# EAGLE board Offical Waffle Maker Copy (EAGLE 9.7.0)

Size 129.43 x 199.96 mm. Coordinates in mm from the lower left corner, seen from the top.
Outline: 0,0 129.44,0 129.44,199.96 0,199.96 0,0
Copper layers (1*16): Top 0.035mm / dielectric 1.5mm / Bottom 0.035mm
Design rules "default": minimum track width 6mil, minimum drill 0.35mm, track to track 6mil, track to pad 6mil, pad to pad 6mil, via to via 6mil, smd to smd 6mil, copper to edge 40mil, drill to drill 6mil, minimum pad ring 10mil, minimum via ring 8mil, stop-mask expansion 4mil, vias tented up to drill 0mil, thermal gap 10mil

## Footprints (pad centres in the part's own frame; a part is rotated, then mirrored left to right if it is on the bottom)
LEDRD254W60D565H860B = drill 0.981 pad 1.581: 1 -1.27,0; 2 1.27,0
LED-RGB-5MM = drill 0.9: B 0.635,0.635; C -0.635,-0.635; G 1.905,-0.635; R -1.905,0.635
MOTOR = drill 1.118 pad 3.15 octagon: + 2.54,0; - -2.54,0
DG01D = drill 1.118 pad 3.15 octagon: + 2.54,0; - -2.54,0
RESAD1016W63L850D250B = drill 0.83 pad 1.43: 1 -5.08,0; 2 5.08,0
HA-06-SM065 = drill 1 pad 1.676: 1 -2.54,-2.54; 2 0,2.54; 3 2.54,-2.54
SWITCH-MOMENTARY-PTH-6.5MM = drill 1.016 pad 1.88: 1 -3.251,2.261; 2 3.251,2.261; 3 -3.251,-2.261; 4 3.251,-2.261
SG90 = drill 1.016 long: 1 -2.54,0; 2 0,0; 3 2.54,0
ARDUINO-UNO-R3-SHIELD = drill 1.016 pad 1.88: 3.3V 24.13,-2.54; 5V 24.13,0; A0 24.13,12.7; A1 24.13,15.24; A2 24.13,17.78; A3 24.13,20.32; A4 24.13,22.86; A5 24.13,25.4; AREF -24.13,-13.97; D2 -24.13,20.32; D3 -24.13,17.78; D4 -24.13,15.24; D5 -24.13,12.7; D6 -24.13,10.16; D7 -24.13,7.62; D8 -24.13,3.81; D9 -24.13,1.27; D10 -24.13,-1.27; D11 -24.13,-3.81; D12 -24.13,-6.35; D13 -24.13,-8.89; GND@0 24.13,2.54; GND@1 24.13,5.08; GND@2 -24.13,-11.43; IOREF 24.13,-7.62; NC 24.13,-10.16; RES 24.13,-5.08; RX -24.13,25.4; SCL -24.13,-19.05; SDA -24.13,-16.51; TX -24.13,22.86; VIN 24.13,7.62

## Placement (x,y rotation side)
D1  RED  [LEDRD254W60D565H860B]  73.28,92.08 180 top
D2  LED-RGBRCBG-PTH  [LED-RGB-5MM]  52.97,92.08 0 top
M1  MOTOR_HDR  [MOTOR]  76.85,116.55 0 top
M2  MOTOR_DG01D  [DG01D]  41.26,125.67 180 top
R1  1k  [RESAD1016W63L850D250B]  84.72,66.67 90 top
R2  330  [RESAD1016W63L850D250B]  74.56,84.45 90 top
R3  10k  [RESAD1016W63L850D250B]  49.16,84.45 90 top
R4  10k  [RESAD1016W63L850D250B]  54.23,84.45 90 top
R5  10k  [RESAD1016W63L850D250B]  56.77,84.45 90 top
R6  1k  [RESAD1016W63L850D250B]  44.08,66.67 90 top
R7  1k  [RESAD1016W63L850D250B]  33.91,66.67 90 top
RPOT1  250k  [HA-06-SM065]  64.39,81.92 0 top
RPOT2  250k  [HA-06-SM065]  21.21,81.92 0 top
S1  SWITCH_MOMENTARY  [SWITCH-MOMENTARY-PTH-6.5MM]  82.17,85.72 90 top
S2  SWITCH_MOMENTARY  [SWITCH-MOMENTARY-PTH-6.5MM]  41.53,85.72 90 top
S3  SWITCH_MOMENTARY  [SWITCH-MOMENTARY-PTH-6.5MM]  31.38,85.72 90 top
SERVO1  SERVOSG90  [SG90]  122.45,119.04 0 top
U1  ARDUINO-UNO-R3-SHIELD  [ARDUINO-UNO-R3-SHIELD]  47.88,29.84 270 top

## Library data of the parts
D1 = Tinkercad; CATEGORY: Opto-Electronic; SUB-CATEGORY: LED; VALUE: LED_RED
D2 M1 M2 R1-R7 RPOT1 RPOT2 S1-S3 SERVO1 U1 = Tinkercad

## Nets
D1_A: D1.1 R2.2
D2_B: D2.B R4.2
D2_G: D2.G R5.2
D2_R: D2.R R3.2
U1_5V: R1.1 R6.1 R7.1 RPOT1.3 RPOT2.3 SERVO1.2 U1.5V
U1_A0: RPOT1.2 U1.A0
U1_A1: RPOT2.2 U1.A1
U1_D2: SERVO1.3 U1.D2
U1_D3: M1.+ U1.D3
U1_D6: M2.+ U1.D6
U1_D9: R5.1 U1.D9
U1_D10: R4.1 U1.D10
U1_D11: R3.1 U1.D11
U1_D12: R6.2 S2.3 S2.4 U1.D12
U1_D13: R7.2 S3.3 S3.4 U1.D13
U1_GND: D1.2 D2.C M1.- M2.- RPOT1.1 RPOT2.1 S1.1 S1.2 S2.1 S2.2 S3.1 S3.2 SERVO1.1 U1.GND@0 U1.GND@1 U1.GND@2
U1_RX: R1.2 S1.3 S1.4 U1.RX
U1_TX: R2.1 U1.TX

## Tracks (layer width: path | path; a pad name or v marks a point on that pad's centre or on a via)
D1_A  (1 unrouted)
D2_B  (1 unrouted)
D2_G  (1 unrouted)
D2_R  (1 unrouted)
U1_5V  (6 unrouted)
U1_A0  (1 unrouted)
U1_A1  (1 unrouted)
U1_D2  (1 unrouted)
U1_D3  (1 unrouted)
U1_D6  (1 unrouted)
U1_D9  (1 unrouted)
U1_D10  (1 unrouted)
U1_D11  (1 unrouted)
U1_D12  (3 unrouted)
U1_D13  (3 unrouted)
U1_GND  (15 unrouted)
U1_RX  (3 unrouted)
U1_TX  (1 unrouted)